# Altium PCB Test.PcbDoc
Units mil, origin at the board's own origin, x right, y up, seen from the top; angles counter-clockwise.
Board outline 6000 x 4000 mil, 2 copper layers (Top Layer, Bottom Layer); 2 components, 2 nets, 14 pads, 0 vias.
Unrouted connection lines stored in the file: 2.
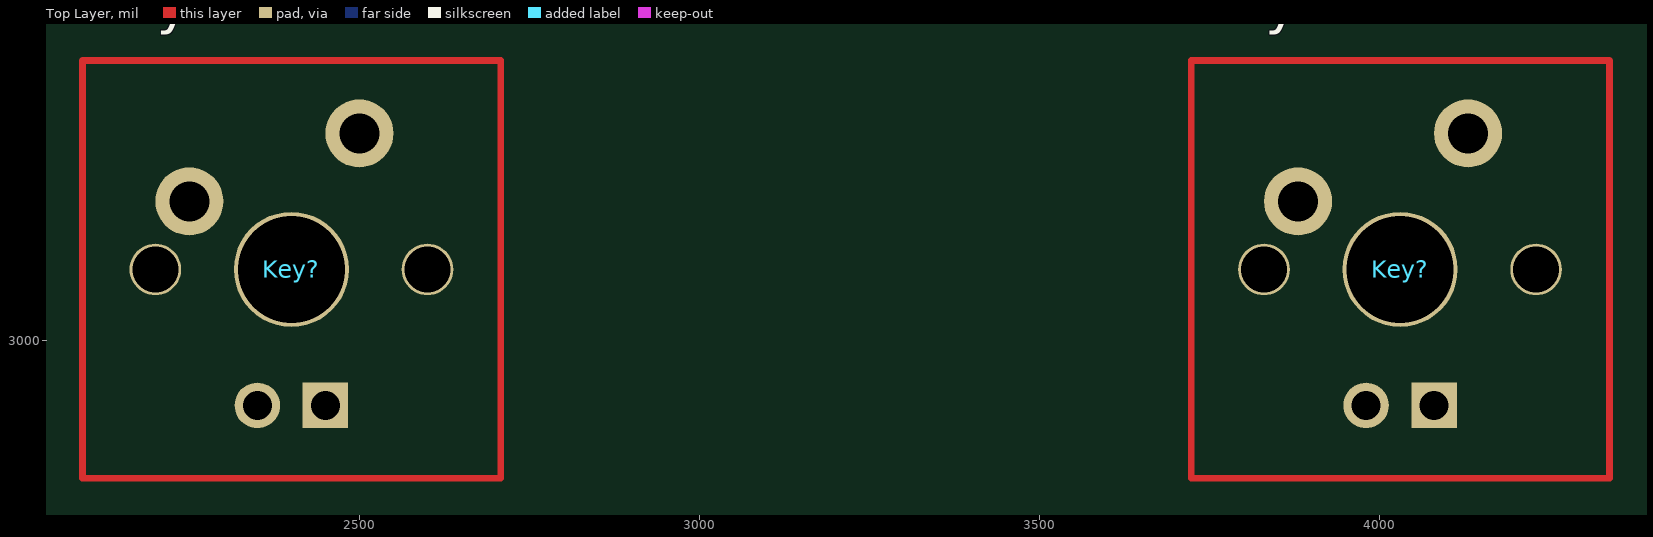
[diagram p0: Top Layer view]
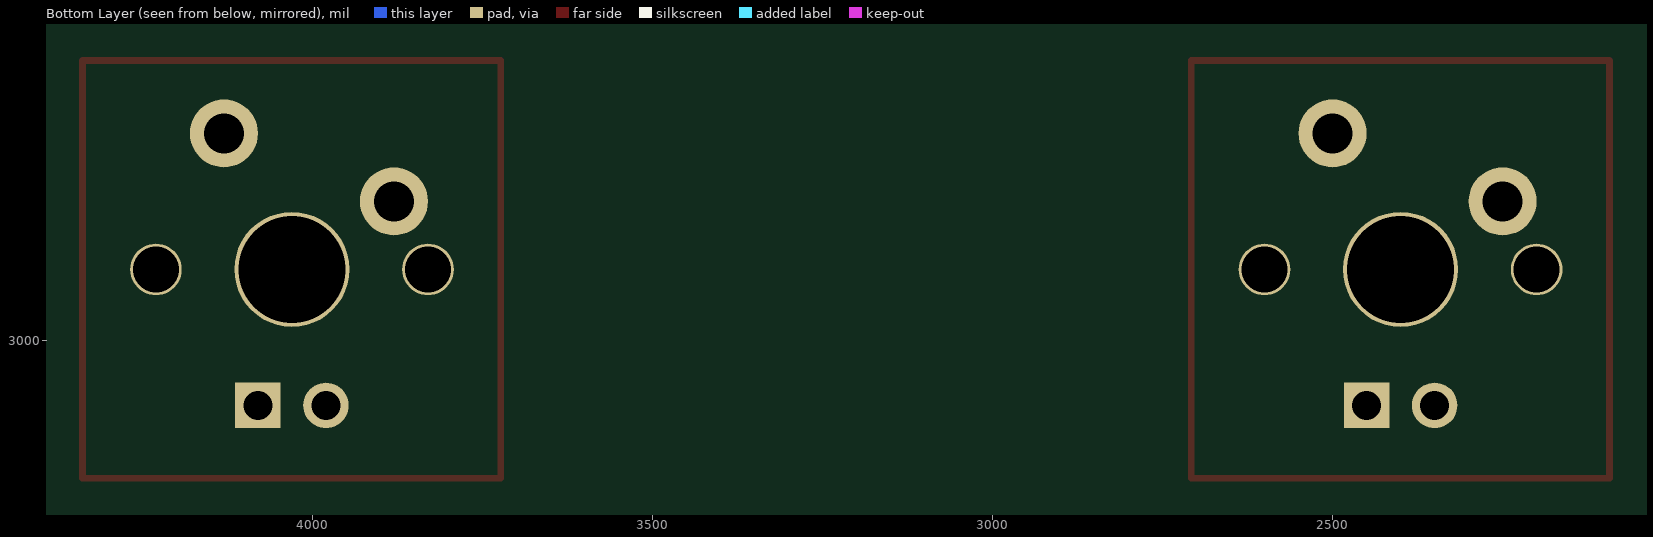
[diagram p1: Bottom Layer view, seen from below]

## Layer stack, top to bottom
Top Solder: solder mask 0.4, Solder Resist, Dk 3.5
Top Layer: signal copper 1.4
Dielectric 1: dielectric 12.6, FR-4, Dk 4.8
Bottom Layer: signal copper 1.4
Bottom Solder: solder mask 0.4, Solder Resist, Dk 3.5

## Board outline
1000,1000 7000,1000 7000,5000 1000,5000

## Design rules (kind name [scope] priority, off if disabled: settings)
Clearance [All] p1: gap=10 ignorepadtopadclearanceinfootprint=FALSE except(0: Arc-Hole Track-Hole SMDPad-Hole THPad-Hole Via-Hole Fill-Hole Poly-Hole Region-Hole Text-Hole)
PolygonConnect [All] p1: connectstyle=Relief reliefconductorwidth=10 reliefentries=4 polygonreliefangle="90 Angle" airgapwidth=10
RoomDefinition Test [InComponentClass('Test')] p1: confinementstyle=ConfineIn formatcopy=TRUE lockcomponents=FALSE outline 5250,1330 6565,1330 6565,2090 5250,2090
RoutingVias [All] p1: holewidth=28 width=50 viastyle="Through Hole" minholewidth=28 minwidth=50 maxholewidth=28 maxwidth=50
SolderMaskExpansion [All] p1: expansion=4
Width [All] p1: maxlimit=10 minlimit=10 preferedwidth=10
30 further rules are at their usual default settings.

## Classes and differential pairs
component class Test: Key?

## Components (designator, comment, footprint, x,y, rotation, side; value= is the part's Value field where it differs from the comment)
Key? "Key?" "Cherry Standard MX Switch" 4030,3105 r0 top
Key? "Key?" "Cherry Standard MX Switch" 2400,3105 r0 top

## Footprints (in the part's own frame and the unit in brackets; to place one, negate y for a bottom-side part, rotate by r counter-clockwise, add the part's x,y. Pads: shape width x height; smd on the part's side, far side on the other; paste and mask are expansions set on the pad)
"Cherry Standard MX Switch" [mm]
  round 2.54 hole 1.5: 0(-3.81,2.54) 1(2.54,5.08)
  round 1.702 hole 1.092: 2(-1.27,-5.08)
  rect 1.702x1.702 hole 1.092: 3(1.27,-5.08)
  round 4.3 hole 4: 4(0,0)
  round 1.93 hole 1.712 unplated: 5(5.08,0)
  round 1.93 hole 1.712: 6(-5.08,0)
  Top Layer lines w0.254: -7.8,-7.8 -7.8,7.8 7.81,7.8 7.821,7.8 7.821,-7.8 -7.8,-7.8

## Part data
Key? Key?: library part "Cherry MX"

## Nets (pads, with @x,y where several pads share a name; then routed paths per layer and width w, separated by ;. In a path a pad name is that pad's centre, name@x,y a point inside that pad or via, vN(x,y) a via of type N, cw(c..) or ccw(c..) an arc to the next point about the centre after c; other vN are vias at no path point)
NetKey?_0: Key?.0
NetKey?_1: Key?.1
pads on no net: Key?.2 Key?.3 Key?.4 Key?.5 Key?.6